# Altium PCB Collar.PcbDoc
Units mil, origin at the board's own origin, x right, y up, seen from the top; angles counter-clockwise.
Board outline 4080 x 2500 mil, 2 copper layers (Top Layer, Bottom Layer); 13 components, 12 nets, 56 pads, 0 vias.
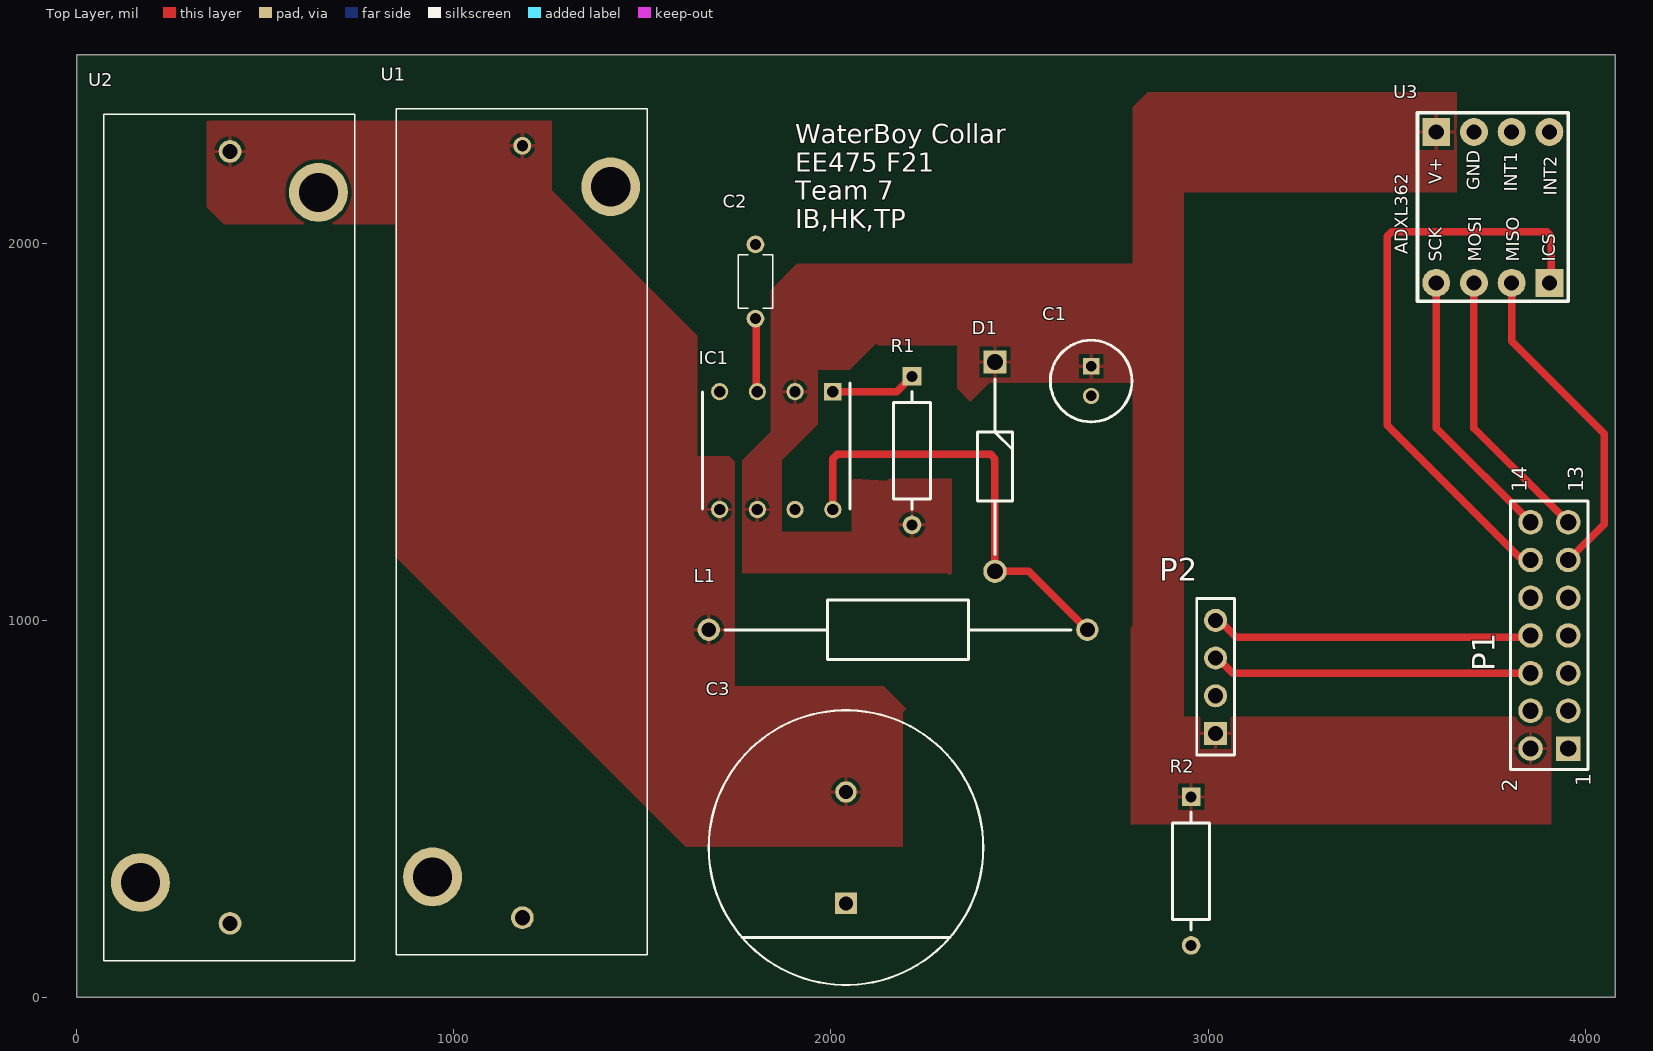
[diagram p0: Top Layer view]
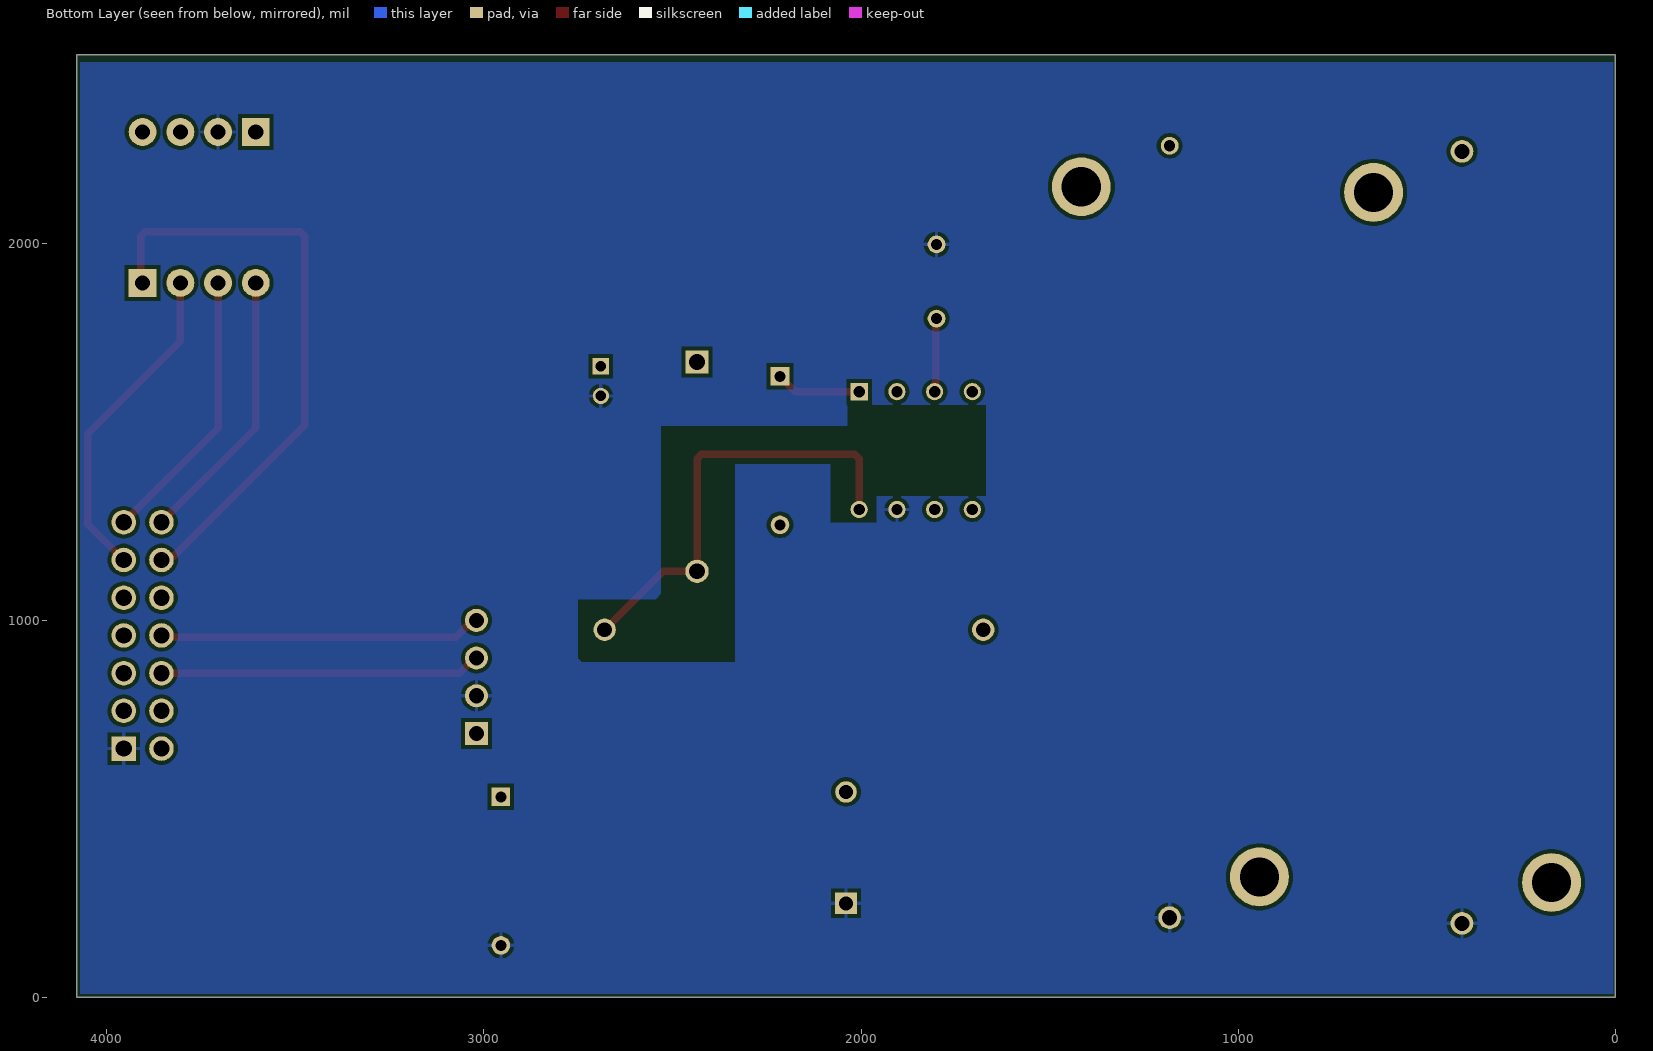
[diagram p1: Bottom Layer view, seen from below]
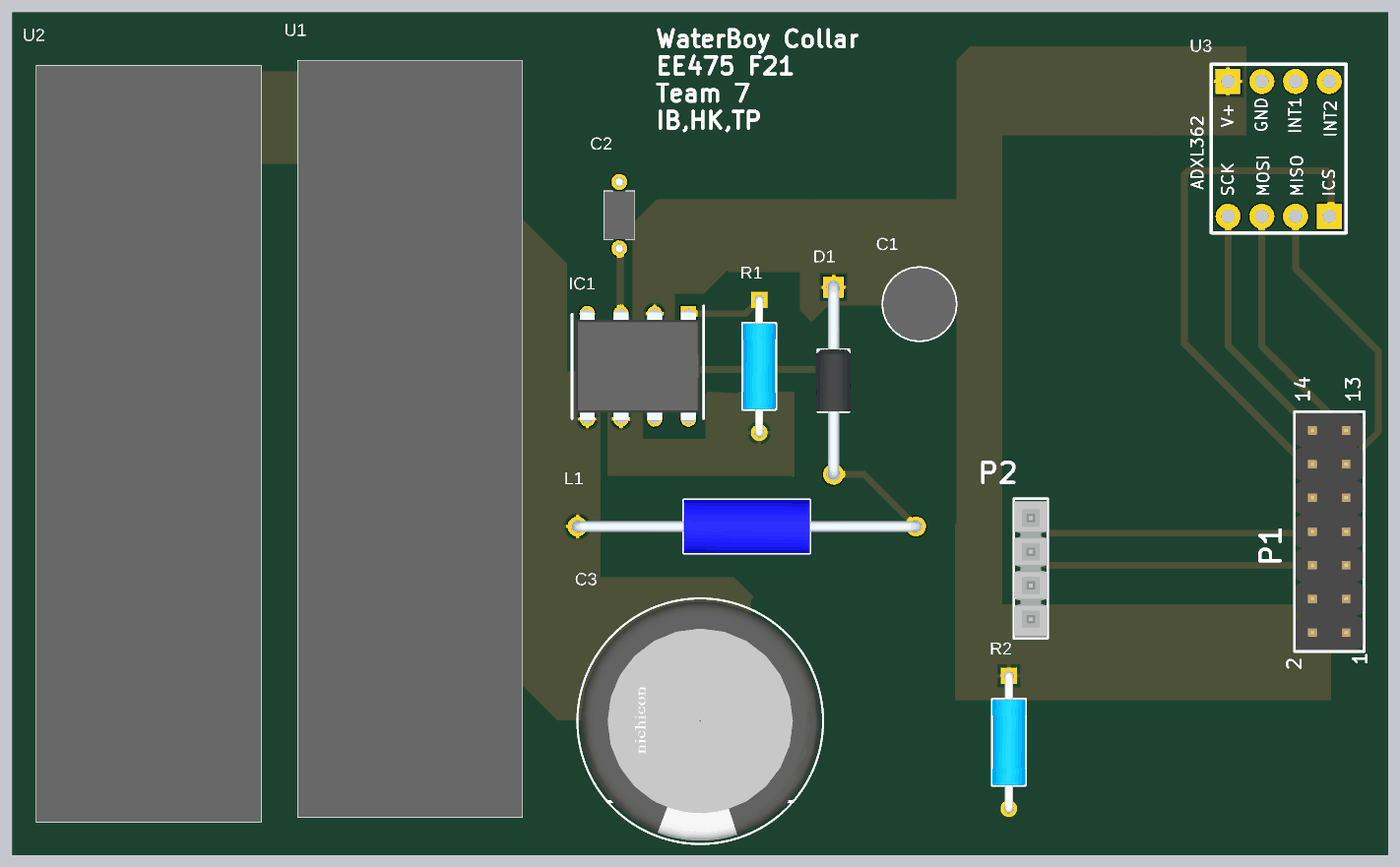
[diagram p2: 3D render of the assembled board from above, using the file's embedded part models]

## Layer stack, top to bottom
Top Solder: solder mask 0.4, Solder Resist, Dk 3.5
Top Layer: signal copper 1.4
Dielectric 1: dielectric 12.6, FR-4, Dk 4.8
Bottom Layer: signal copper 1.4
Bottom Solder: solder mask 0.4, Solder Resist, Dk 3.5

## Board outline
0,0 4080,0 4080,2500 0,2500

## Design rules (kind name [scope] priority, off if disabled: settings)
Clearance [All] p1: gap=10 ignorepadtopadclearanceinfootprint=FALSE except(0: Arc-Hole Track-Hole SMDPad-Hole THPad-Hole Via-Hole Fill-Hole Poly-Hole Region-Hole Text-Hole)
HoleSize [All] p1: absolutevalues=TRUE maxlimit=150 minlimit=10 maxpercent=80.000 minpercent=20.000
PolygonConnect [All] p1: connectstyle=Relief reliefconductorwidth=10 reliefentries=4 polygonreliefangle="90 Angle" airgapwidth=10
RoomDefinition Collar [InComponentClass('Collar')] p1: confinementstyle=ConfineIn formatcopy=TRUE lockcomponents=FALSE outline -45,-20 -55,-10 -55,2555 4115,2555 4150,2520 4115,2485 4115,-90 -50,-90
RoutingVias [All] p1: holewidth=28 width=50 viastyle="Through Hole" minholewidth=28 minwidth=50 maxholewidth=28 maxwidth=50
SolderMaskExpansion [All] p1: expansion=4 istentingtop=FALSE
Width [All] p1: maxlimit=50 minlimit=10 preferedwidth=20
29 further rules are at their usual default settings.

## Components (designator, comment, footprint, x,y, rotation, side; value= is the part's Value field where it differs from the comment)
C1 "100uF" CAPPRD200W50D550H1250 2690,1673.74 r270 top
C2 "0.1uF" K104K10X7RF5UH5 1800,1800 r90 top
C3 "150uF" FP-UCY2V151MHD-MFG 2040,397.36 r90 top
D1 "1N5817" DIOAD1405W86L465D235 2435,1685 r270 top
IC1 "MAX756EPA+" DIP794W56P254L938H457Q8N 1855,1450 r270 top
L1 "22uH" INDAD2550W80L950D400 2680,975 r180 top
P1 "EZ430-F2013" 61301421121 3905,960 r90 top
P2 "HM-10 BLE" SMTC-TSW-104-08-X-S 3020,700 r90 top
R1 "1kOhm" FP-MRS25-MFG 2215,1450 r270 top value=1.1kΩ
R2 "1kOhm" FP-MRS25-MFG 2955,335 r270 top value=1.1kΩ
U1 "2460" 2460#1 1180,1235 r90 top
U2 "2460" 2460#2 405,1220 r90 top
U3 "Sparkfun ADXL362 SEN-11446" "ADXL362 Breakout Board" 3955,1846 r90 top

## Footprints (in the part's own frame and the unit in brackets; to place one, negate y for a bottom-side part, rotate by r counter-clockwise, add the part's x,y. Pads: shape width x height; smd on the part's side, far side on the other; paste and mask are expansions set on the pad)
2460#1 [mm]
  round 1.2 hole 0.75: 1(25.995,-0.045)
  round 1.53 hole 1.02: 2(-25.995,-0.045)
  round 3.96 hole 2.64: 3(-23.245,5.995) 4(23.235,-5.995)
  silkscreen extent -28.5,-8.44 28.5,8.44, body extent -28.5,-8.44 28.5,8.44, height 14.1
2460#2 [mm]
  round 1.53 hole 1.02: 1(25.995,-0.045) 2(-25.995,-0.045)
  round 3.96 hole 2.64: 3(-23.245,5.995) 4(23.235,-5.995)
  silkscreen extent -28.5,-8.44 28.5,8.44, body extent -28.5,-8.44 28.5,8.44, height 14.1
61301421121 [mm] "Pin Header, pitch 2.54 mm, THT, Vertical, dual row, 14p"
  rect 1.65x1.65 hole 1.1: 1(-7.62,-1.27)
  round 1.65 hole 1.1: 2(-7.62,1.27) 3(-5.08,-1.27) 4(-5.08,1.27) 5(-2.54,-1.27) 6(-2.54,1.27) 7(0,-1.27) 8(0,1.27) 9(2.54,-1.27) 10(2.54,1.27) 11(5.08,-1.27) 12(5.08,1.27) 13(7.62,-1.27) 14(7.62,1.27)
  silkscreen extent -9.04,-2.62 9.04,2.62, body extent -8.89,-2.54 8.89,2.54, height 8.59
"ADXL362 Breakout Board" [mil]
  rect 74x74 / inner round 68.37 / far side rect 74x74 hole 40: 1(449,350) 8(49,50)
  round 74 hole 40: 2(449,250) 3(449,150) 4(449,50) 5(49,350) 6(49,250) 7(49,150)
  silkscreen extent 0,0 500,400
CAPPRD200W50D550H1250 [mm]
  rect 1.1x1.1 hole 0.7: 1(0,0)
  round 1.1 hole 0.7: 2(2,0)
  silkscreen extent -1.75,-2.75 3.75,2.75, body extent -1.75,-2.75 3.75,2.75, height 12.5
DIOAD1405W86L465D235 [mm]
  rect 1.575x1.575 hole 1.05: 1(0,0)
  round 1.575 hole 1.05: 2(14.1,0)
  silkscreen extent 1.14,-1.17 12.96,1.17, body extent -0.43,-1.35 14.48,1.35, height 2.69
DIP794W56P254L938H457Q8N [mm]
  rect 1.16x1.16 hole 0.76: 1(-3.97,3.81)
  round 1.16 hole 0.76: 2(-3.97,1.27) 3(-3.97,-1.27) 4(-3.97,-3.81) 5(3.97,-3.81) 6(3.97,-1.27) 7(3.97,1.27) 8(3.97,3.81)
  silkscreen extent -4.55,-4.95 3.94,4.95, body extent -4.11,-4.69 4.11,4.69, height 4.57
FP-MRS25-MFG [mm]
  rect 1.25x1.25 hole 0.75 paste-1000 mask+0: 1(-5,0)
  round 1.25 hole 0.75 paste-1000 mask+0: 2(5,0)
  silkscreen extent -3.98,-1.25 3.98,1.25, body extent -5.72,-1.35 5.72,1.35, height 0.25
FP-UCY2V151MHD-MFG [mm]
  rect 1.45x1.45 hole 0.95 paste-1000 mask+0: 1(-3.75,0)
  round 1.45 hole 0.95 paste-1000 mask+0: 2(3.75,0)
  silkscreen extent -9.25,-9.25 9.25,9.25, body extent -9.35,-9.35 9.35,9.35, height 0.25
INDAD2550W80L950D400 [mm]
  round 1.5 hole 1: 1(0,0) 2(25.5,0)
  silkscreen extent 1.1,-2 24.4,2, body extent -0.4,-2 25.9,2, height 4
K104K10X7RF5UH5 [mm]
  round 1.2 hole 0.75: 1(0,0) 2(5,0)
  silkscreen extent 0.7,-1.15 4.3,1.15, body extent -0.27,-1.15 5.28,1.15, height 6.3
SMTC-TSW-104-08-X-S [mm] ".025 SQ Post Terminal Strip Assembly, 1x4 Pins, Vertical, 2.54mm Pitch, Male"
  rect 1.55x1.55 hole 1.02: 1(0,0)
  round 1.55 hole 1.02: 2(2.54,0) 3(5.08,0) 4(7.62,0)
  silkscreen extent -1.46,-1.27 9.08,1.27, body extent -1.27,-1.27 8.89,1.27, height 8.38

## Part data
C1: library part 107CKE025MEM, "Capacitor Polarised", Manufacturer_Name="Cinch Connectivity Solutions", Datasheet Link=https://componentsearchengine.com/Datasheets/2/107CKE025MEM.pdf, Height=12.5mm, Manufacturer_Part_Number=107CKE025MEM
C2: library part K104K10X7RF5UH5, "Capacitor", Manufacturer_Name=Vishay, Mouser Part Number=594-K104K10X7RF5UH5, Arrow Part Number=K104K10X7RF5UH5, Arrow Price/Stock=https://www.arrow.com/en/products/k104k10x7rf5uh5/vishay, Datasheet Link=https://www.vishay.com/docs/45171/kseries.pdf, Height=6.2mm, Manufacturer_Part_Number=K104K10X7RF5UH5, Mouser Price/Stock=https://www.mouser.co.uk/ProductDetail/Vishay-BC-Components/K104K10X7RF5UH5?qs=rLgk8CAOBHbAqIwDswVbzA%3D%3D
C3: library part CMP-12462-000029-1, "CAP ALUM 150UF 20% 350V RADIAL", Case/Package=Radial, Max Operating Temperature=105°C, Min Operating Temperature=-40°C, Package Quantity=50, Ripple Current=1.08A, Tolerance=20%, Voltage Rating=350V, Capacitance=150uF, Diameter=18mm, Dissipation Factor=0.24%, Features="General Purpose", Height=35.5mm, Height - Seated (Max)=1.457inch, Lead Pitch=0.295inch, Lead/Base Style=Straight, Length=35.5mm, Life (Hours)=12000Hour, Mount="Through Hole", Packaging=Bulk, RoHS Compliant=Yes, Series=CY, Termination=Radial, Voltage Rating (DC)=350V
D1: "Diode", Manufacturer_Name="ON Semiconductor", Mouser Part Number=512-1N5817, Arrow Part Number=1N5817, Arrow Price/Stock=https://www.arrow.com/en/products/1n5817/on-semiconductor, Datasheet Link=http://www.onsemi.com/pub/Collateral/1N5817-D.PDF, Manufacturer_Part_Number=1N5817, Mouser Price/Stock=https://www.mouser.co.uk/ProductDetail/ON-Semiconductor-Fairchild/1N5817?qs=Ro3gc6G1sTm8wr1Du93jFw%3D%3D
IC1: "Integrated Circuit", Manufacturer_Name="Maxim Integrated", Mouser Part Number=700-MAX756EPA, Datasheet Link=https://datasheets.maximintegrated.com/en/ds/MAX756-MAX757.pdf, Height=4.572mm, Manufacturer_Part_Number=MAX756EPA+, Mouser Price/Stock=https://www.mouser.co.uk/ProductDetail/Maxim-Integrated/MAX756EPA%2b?qs=Mqkh4jHMT8wojtrRK8SBig%3D%3D
L1: library part B78108E1223K000, "Inductor", Manufacturer_Name=TDK, Mouser Part Number=871-B78108E1223K000, Datasheet Link=https://product.tdk.com/system/files/dam/doc/product/inductor/inductor/lead/data_sheet/30/ds/b78108_148e.pdf, Manufacturer_Part_Number=B78108E1223K000, Mouser Price/Stock=https://www.mouser.com/Search/Refine.aspx?Keyword=871-B78108E1223K000
P1: library part CMP-1502-01093-1, "THT Vertical Pin Header WR-PHD, Pitch 2.54 mm, Dual Row, 14 pins", Contact Resistance=20mOhm, Manufacturer="Wurth Elektronik", Operating Temperature=-40to105degC, Package Reference=61301421121, Rated Current=3A, Withstanding Voltage=500VAC, Working Voltage=250VAC, Datasheet URL=https://katalog.we-online.de/em/datasheet/6130xx21121.pdf, Gender=Male, Manufacturer URL=http://www.we-online.de, Mounting Technology=THT, Orientation=Vertical, Packaging=Bag, Part Number=61301421121, Pin Number=14, Pitch=2.54mm, Publisher=WurthElektronik, Row Number=Dual
P2: library part CMP-1024-00357-1, "0.025\" SQ Post Header, Through-hole, Vertical, -55 to 125 degC, 2.54 mm Pitch, 4-Pin, Male, RoHS", Manufacturer=Samtec, PartNumber=TSW-104-08-G-S, Temperature Range="-55 to 125 degC", ComponentLink1Description="Manufacturer URL", ComponentLink1URL=http://www.samtec.com, ComponentLink2Description=Datasheet, ComponentLink2URL=http://www.samtec.com/documents/webfiles/pdf/TSW_TH.PDF, ComponentLink3Description="Package Specification", ComponentLink3URL=http://www.samtec.com/documents/webfiles/cpdf/TSW-XXX-XX-XXX-X-XX-XXX-MKT.pdf, DatasheetVersion=F-214, Mounting Technology=Through-hole, Orientation=Vertical, PackageDescription=".025[0.64] SQ. Post Terminal Strip Assembly", PackageReference=TSW-104-08-X-S, PackageVersion="DM, 8/1988", Pitch="2.54 mm", RoHS=True
R1 R2: library part CMP-02408-000003-1, "RES 1.1K OHM 0.6W 1% AXIAL", Manufacturer="Vishay BC Components", Manufacturer Part Number=MRS25000C1101FCT00, Package=MRS25, Power Rating=0.6W, Resistance=1.1kΩ, Temperature="-55°C to +155°C", Temperature Coefficient=50ppm/°C, Temperature Range High=+155°C, Temperature Range Low=-55°C, Tolerance=1%, Voltage Rating=350V, Automotive=No, Category=Res, ComponentLink2Description=Datasheet, ComponentLink2URL=http://www.vishay.com/docs/28724/mrs16m25.pdf, Composition="Thin Film", Device Class L1="Passive Components", Device Class L2=Resistors, Device Class L3="Through-Hole Resistors", Digikey Description="RES 1.1K OHM 0.6W 1% AXIAL", Height=2.5mm, Ipc Land Pattern Name=RESAD1000W75L650D250, Lead Free=Yes, Mouser Description="Thin Film Resistors .6watt 1.1Kohms 1%", Octopart=https://octopart.com/mrs25000c1101fct00-vishay-43740214, RoHS=TRUE, Series=MRS25
U1 U2: "Undefined or Miscellaneous", Manufacturer_Name="Keystone Electronics", Mouser Part Number=534-2460, Datasheet Link=http://www.keyelco.com/product-pdf.cfm?p=1025, Height=14mm, Manufacturer_Part_Number=2460, Mouser Price/Stock=https://www.mouser.co.uk/ProductDetail/Keystone-Electronics/2460?qs=3CbvriavsLB6FI3qURcWXQ%3D%3D
U3: library part "ADXL362 Breakout Board", "ADXL362 Breakout Board"

## Nets (pads, with @x,y where several pads share a name; then routed paths per layer and width w, separated by ;. In a path a pad name is that pad's centre, name@x,y a point inside that pad or via, vN(x,y) a via of type N, cw(c..) or ccw(c..) an arc to the next point about the centre after c; other vN are vias at no path point)
3v3: C1.1 D1.1 IC1.2 IC1.6 P1.2 P2.1 R1.2 R2.1 U3.1
"BLE RX": P1.8 P2.4 | length 855.7
  Top Layer w20: P2.4 3030,1000 3075,955 3850,955 P1.8
"BLE TX": P1.6 P2.3 | length 851.6
  Top Layer w20: P2.3 3025.58,900 3065.58,860 P1.6
GND: C1.2 C2.2 C3.1 IC1.7 P1.1 P2.2 R2.2 U1.2 U2.2 U3.2
ICS: P1.12 U3.8 | length 1598.9
  Top Layer w20: P1.12 3846.4,1168.6 3823.97,1168.6 3475,1517.57 3475,2018.28 3486.72,2030 3898.28,2030 3910,2018.28 3910,1900 U3.8
MISO: P1.11 U3.7 | length 875.8
  Top Layer w20: U3.7 3805,1740 4050,1495 4050,1255 P1.11
MOSI: P1.13 U3.6 | length 738.6
  Top Layer w20: U3.6 3705,1510 P1.13
NetC2_1: C2.1 IC1.3 | length 195.8
  Top Layer w10: C2.1 C2.1@1802.5,1797.5 ; IC1.3@1802.5,1608.8 IC1.3
  Top Layer w20: IC1.3@1802.5,1608.8 C2.1@1802.5,1797.5
NetC3_2: C3.2 IC1.5 L1.2 U1.1 U2.1
NetD1_2: D1.2 IC1.8 L1.1 | length 1181.8
  Top Layer w20: IC1.8 2005,1428.28 2016.72,1440 2423.28,1440 2435,1428.28 D1.2 2525.12,1129.88 L1.1
NetIC1_1: IC1.1 R1.1 | length 226.8
  Top Layer w20: IC1.1 2174.45,1606.3 R1.1
SCK: P1.14 U3.5 | length 738.6
  Top Layer w20: U3.5 3605,1510 P1.14
pads on no net: IC1.4 P1.3 P1.4 P1.5 P1.7 P1.9 P1.10 U1.3 U1.4 U2.3 U2.4 U3.3 U3.4

## Polygon pours and split planes (outlines as drawn)
3v3 on Top Layer "3V3_L01_P005" (solid, pour order 5): 2800,985 2795,980 2795,460 3910,460 3910,745 2935,745 2935,2135 3660,2135 3660,2400 2840,2400 2800,2360
3v3 on Top Layer "3V3_L01_P004" (solid, pour order 4): 2150,1370 2155,1375 2320,1375 2320,1125 2315,1120 2310,1125 1765,1125 1765,1245 1775,1235 2055,1235 2055,1370 2060,1375
3v3 on Top Layer "3V3_L01_P003" (solid, pour order 3): 1765,1425 1765,1235 1770,1230 1870,1230 1870,1425 1965,1520 1965,1665 2050,1665 2120,1735 2125,1730 2335,1730 2335,1615 2370,1580 2420,1630 2880,1630 2900,1650 2900,1945 1910,1945 1840,1875 1840,1500 1770,1430
NetC3_2 on Top Layer "NETC3_2_L01_P002" (solid, pour order 2): 1645,1435 1730,1435 1745,1420 1745,825 2140,825 2200,765 2190,755 2190,400 1615,400 845,1170 845,2235 1165,2235 1645,1755 1645,1440
NetC3_2 on Top Layer "NETC3_2_L01_P001" (solid, pour order 1): 335,2340 350,2325 1260,2325 1260,2125 1255,2120 1260,2115 1260,2050 390,2050 345,2095 345,2325
GND on Bottom Layer "GND_L02_P000" (solid, pour order 0): 5,2479.63 5,10 4070,10 4070,2479.63

## Other copper
Bottom Layer:
  pour cut-out: 1960,1260 2080,1260 2080,1415 2335,1415 2335,1200 2530,1200 2530,1515 1990,1515 1960,1485 1960,1335
  pour cut-out: 2530,1200 2530,1070 2545,1055 2750,1055 2750,900 2740,890 2335,890 2335,1200
  pour cut-out: 1670,1570 2035,1570 2035,1325 2030,1330 1670,1330

## Silkscreen, mask and mechanical layers (free items; w line width, h text height)
Top Overlay:
  text "WaterBoy Collar / EE475 F21 / Team 7 / IB,HK,TP" at 1905,2040 h50
Mechanical 1:
  the board outline again, w0.01

## Text inside footprints (layer, text, board x,y; h text height)
P1: Top Overlay "14" at 3845,1340 h40 r90; Top Overlay "13" at 3995,1340 h40 r90; Top Overlay "2" at 3820,545 h40 r90; Top Overlay "1" at 4015,560 h40 r90
U3: Top Overlay "ADXL362" at 3530,1971 h34 r90; Top Overlay "ICS" at 3920,1951 h34 r90; Top Overlay "MISO" at 3825,1951 h34 r90; Top Overlay "MOSI" at 3725,1951 h34 r90; Top Overlay "SCK" at 3620,1951 h34 r90; Top Overlay "INT2" at 3925,2126 h34 r90; Top Overlay "INT1" at 3820,2136 h34 r90; Top Overlay "GND" at 3720,2141 h34 r90; Top Overlay "V+" at 3620,2156 h34 r90